# Altium PCB FuelCellMonitor.PcbDoc (part 1 of 2)
Units mil, origin at the board's own origin, x right, y up, seen from the top; angles counter-clockwise.
Board outline 6000 x 4000 mil, 2 copper layers (Top Layer, Bottom Layer); 108 components, 58 nets, 336 pads, 87 vias.
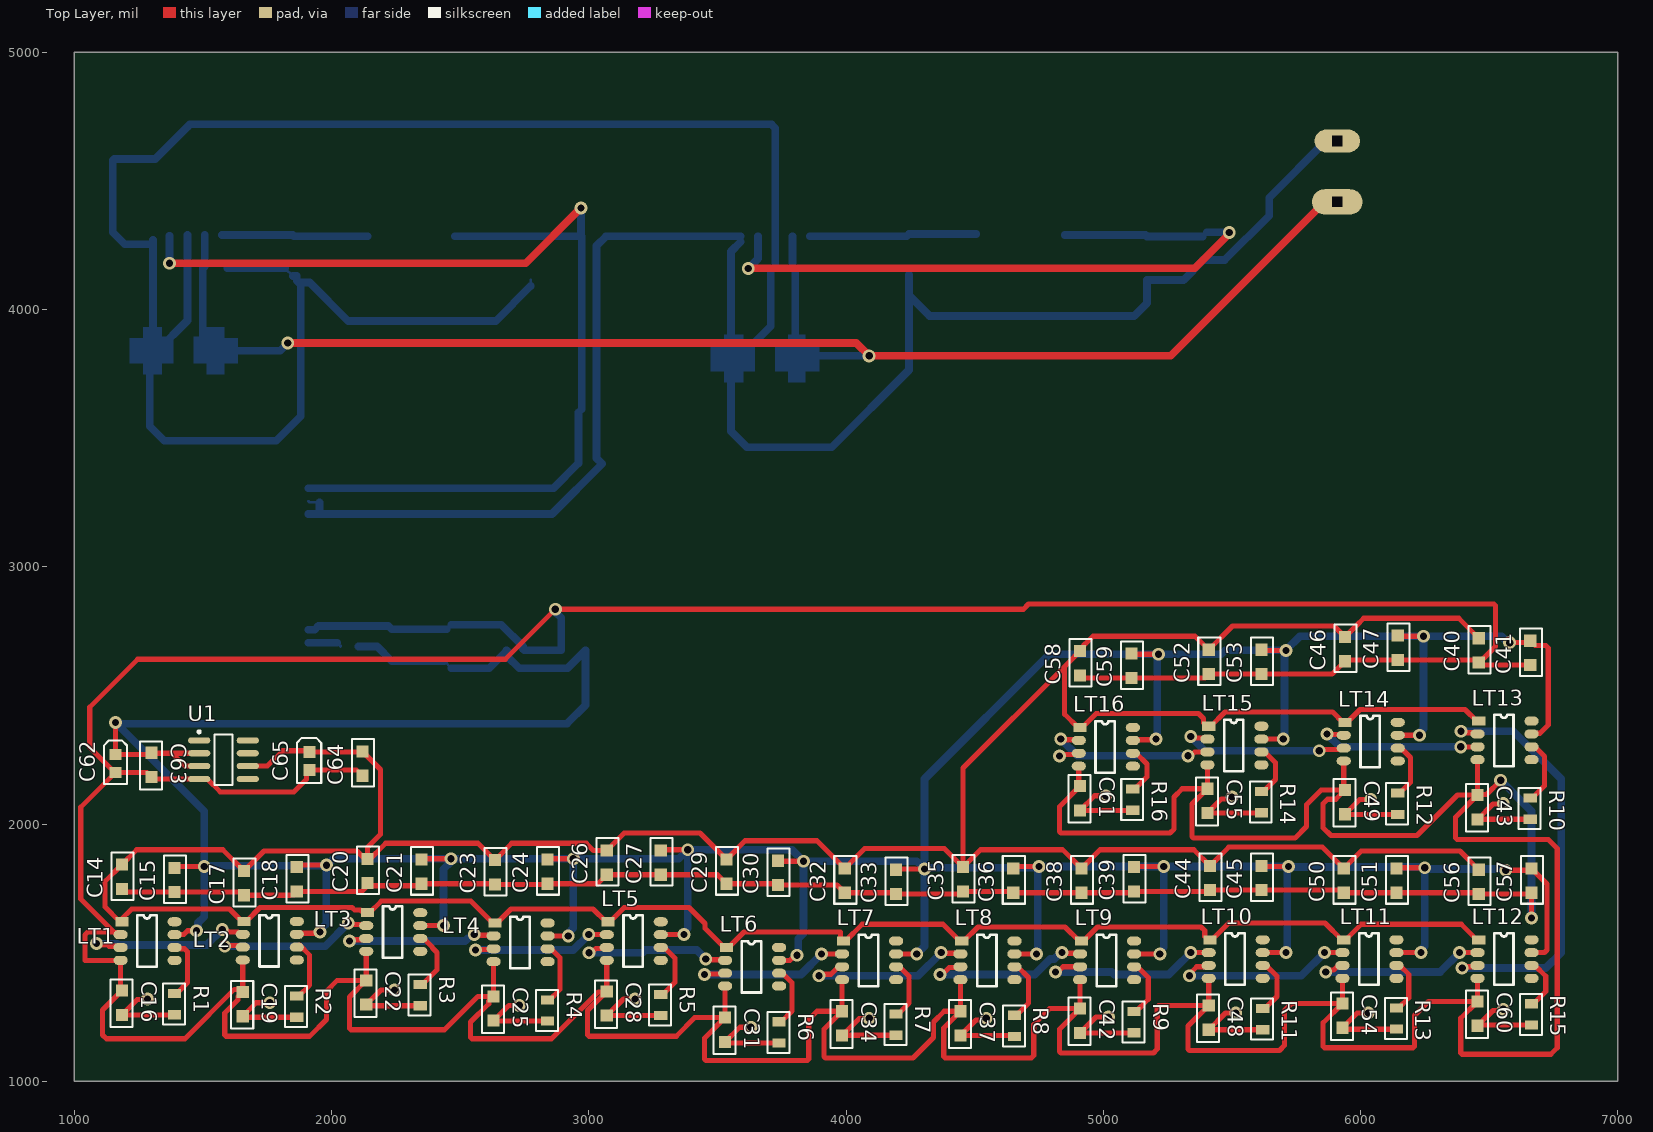
[diagram p0: Top Layer view]
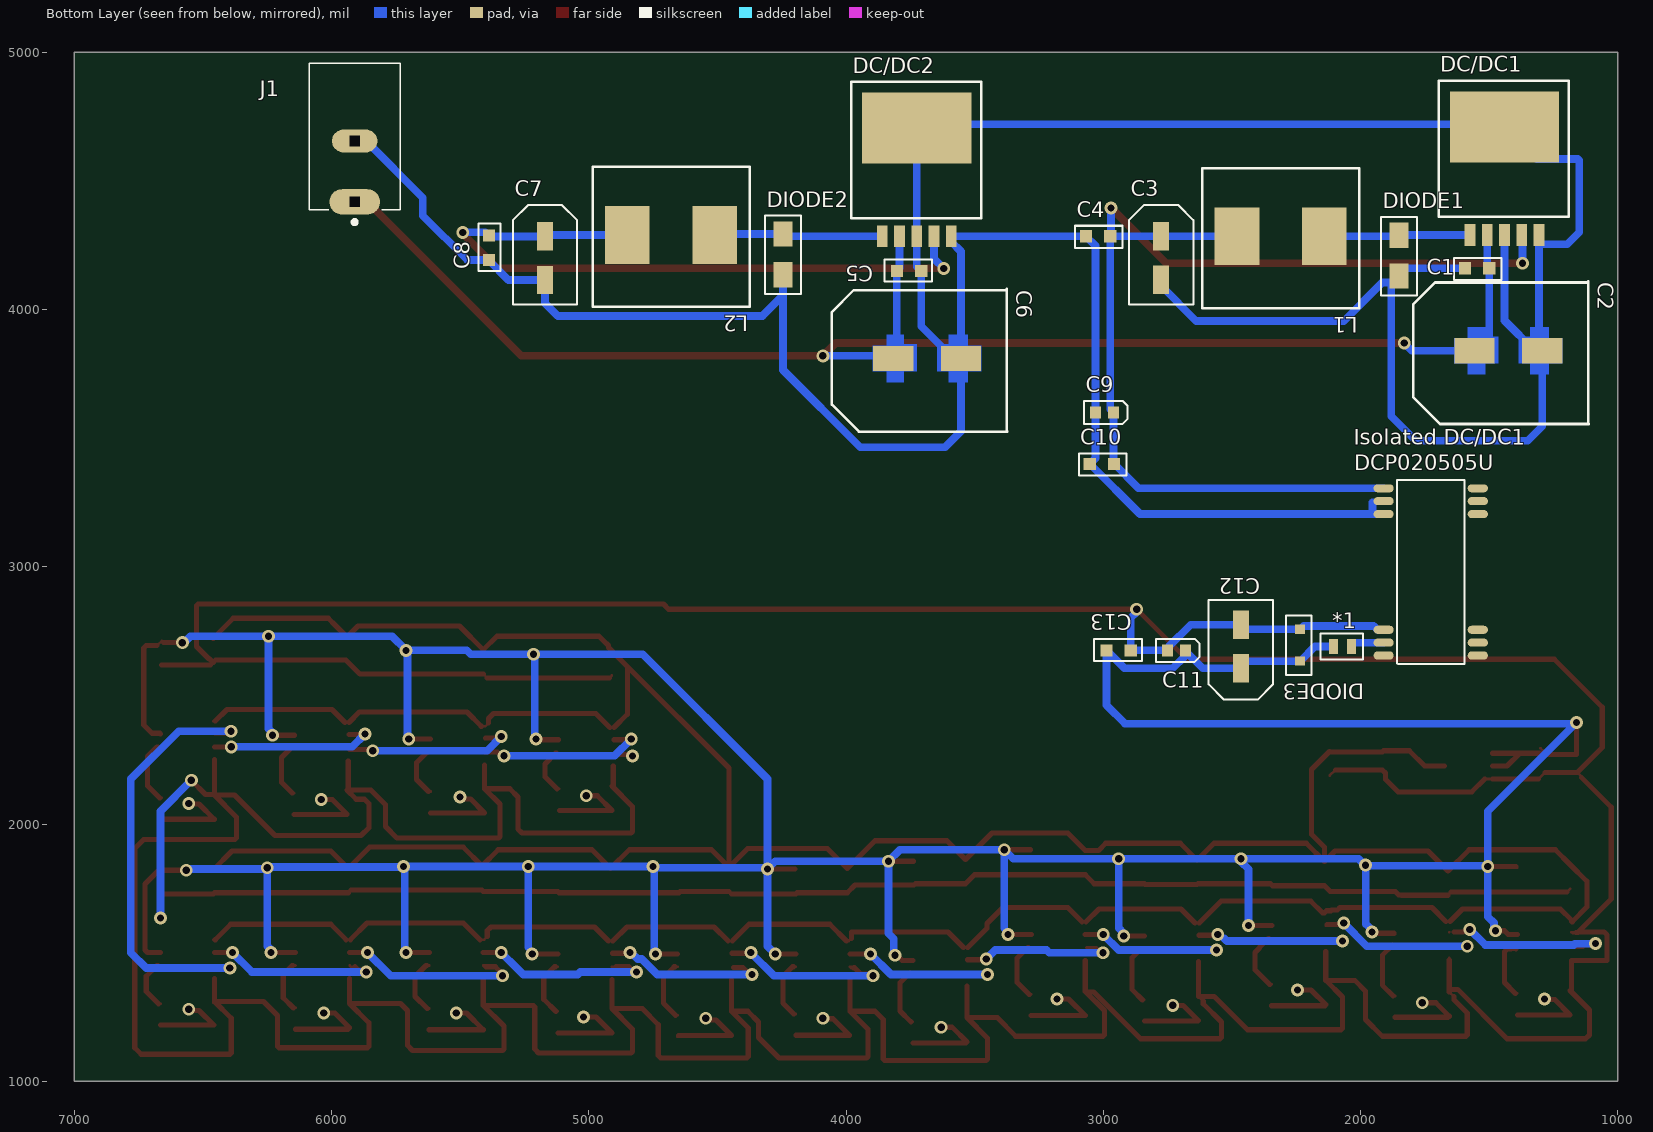
[diagram p1: Bottom Layer view, seen from below]
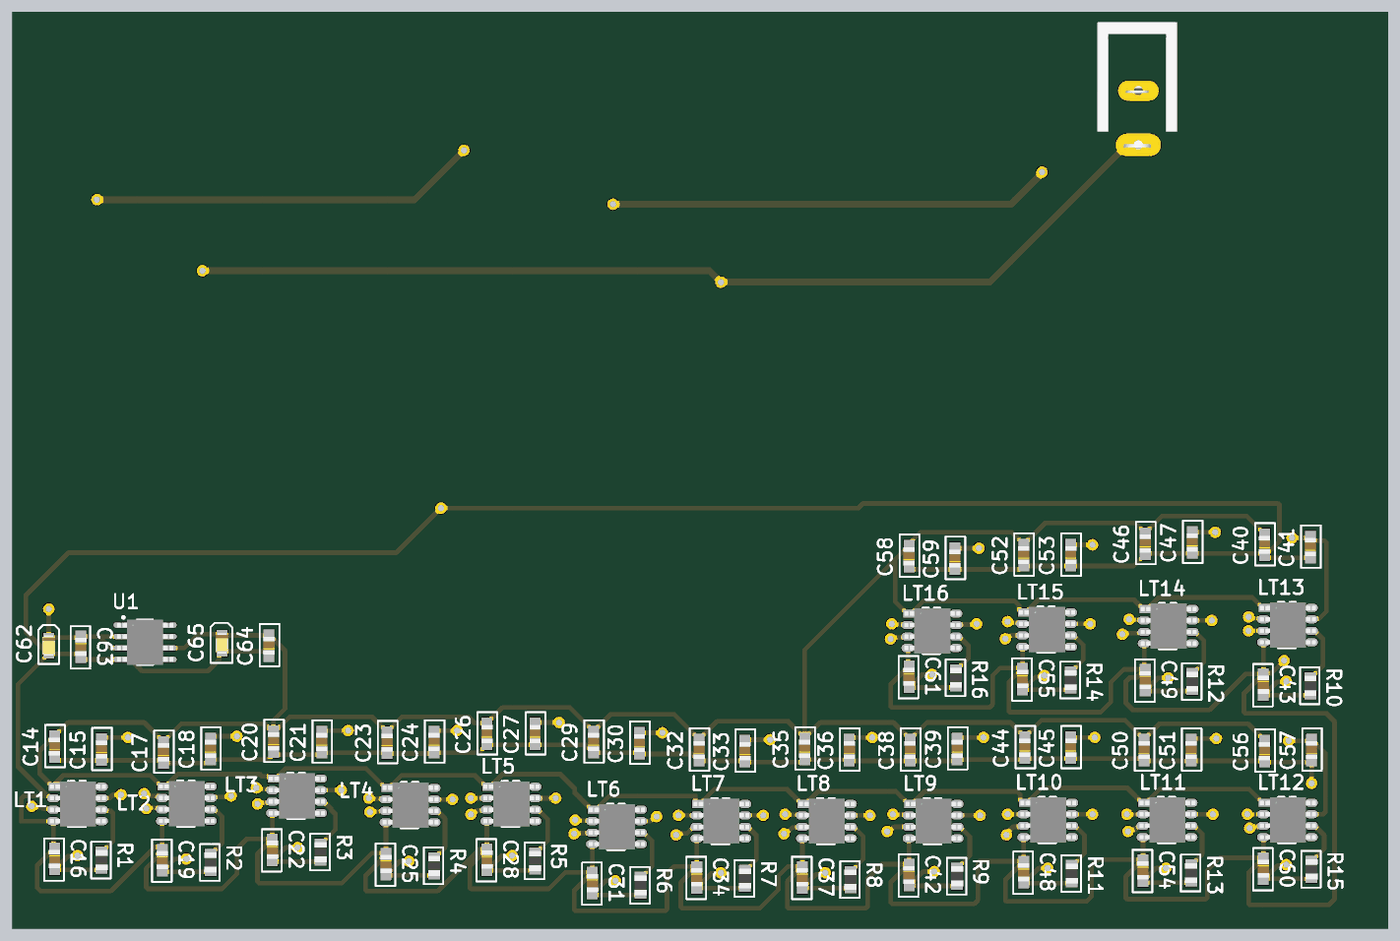
[diagram p2: 3D render of the assembled board from above, using the file's embedded part models]
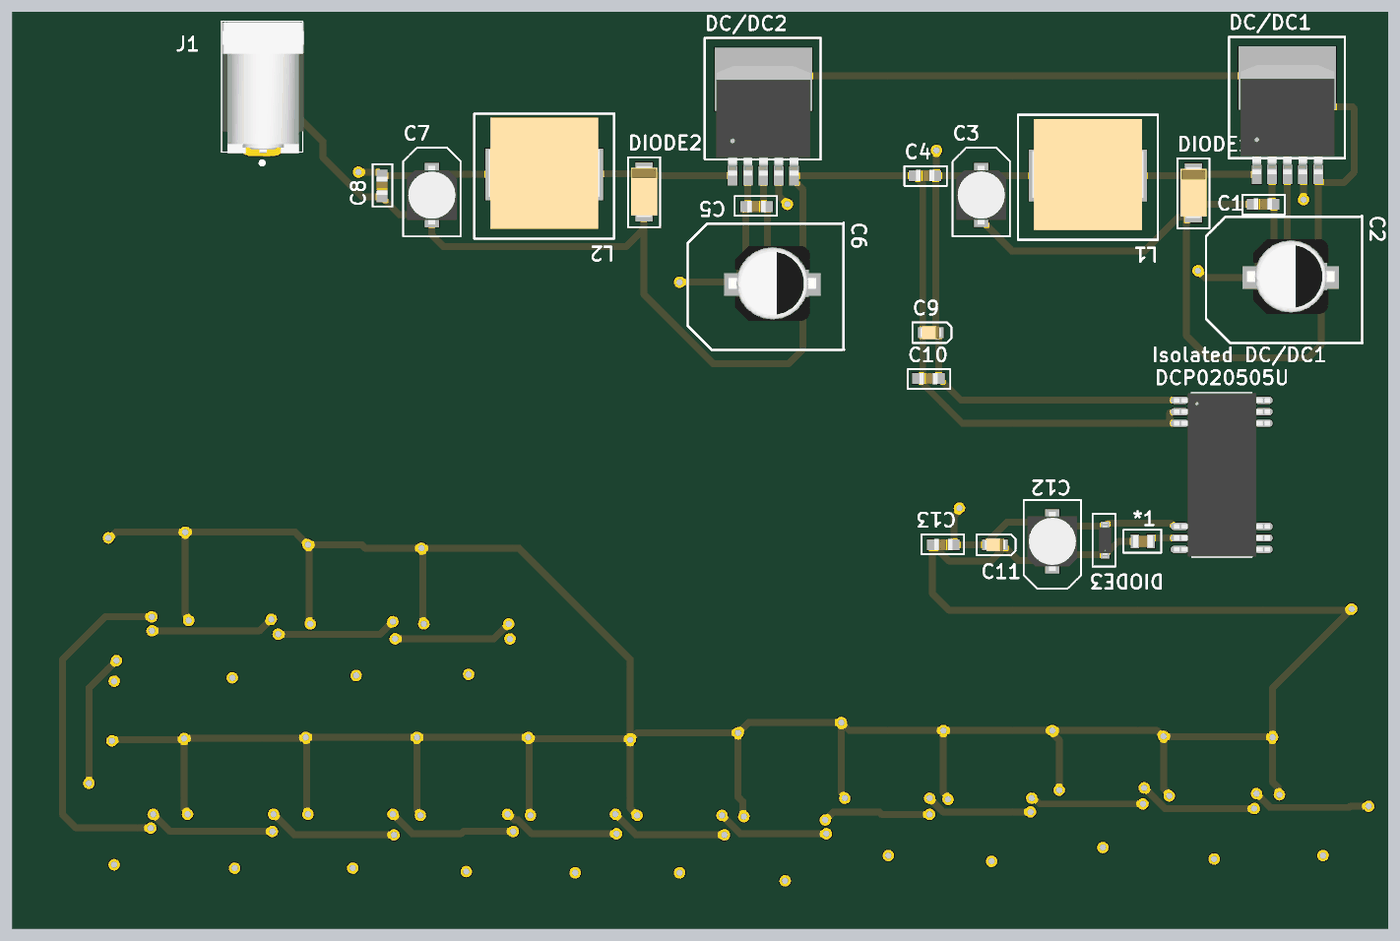
[diagram p3: 3D render of the assembled board from below, using the file's embedded part models]

## Layer stack, top to bottom
Top Solder: solder mask 0.4, Solder Resist, Dk 3.5
Top Layer: signal copper 1.4
Dielectric 1: dielectric 12.6, FR-4, Dk 4.8
Bottom Layer: signal copper 1.4
Bottom Solder: solder mask 0.4, Solder Resist, Dk 3.5

## Board outline
1000,1000 7000,1000 7000,5000 1000,5000

## Design rules (kind name [scope] priority, off if disabled: settings)
Clearance [All] p1: gap=10 ignorepadtopadclearanceinfootprint=FALSE except(0: Arc-Hole Track-Hole SMDPad-Hole THPad-Hole Via-Hole Fill-Hole Poly-Hole Region-Hole Text-Hole)
PolygonConnect [All] p1: connectstyle=Relief reliefconductorwidth=10 reliefentries=4 polygonreliefangle="90 Angle" airgapwidth=10
RoutingVias [All] p1: holewidth=28 width=50 viastyle="Through Hole" minholewidth=28 minwidth=50 maxholewidth=28 maxwidth=50
SolderMaskExpansion [All] p1: expansion=4 istentingtop=FALSE
Width [All] p1: maxlimit=100 minlimit=5 preferedwidth=10
30 further rules are at their usual default settings.

## Classes and differential pairs
component class FuelCellMonitor: J1
component class Designator: C14 C15 C16 C17 C18 C19 C20 C21 C22 C23 C24 C25 C26 C27 C28 C29 C30 C31 C32 C33 C34 C35 C36 C37 C38 C39 C40 C41 C42 C43 C44 C45 C46 C47 C48 C49 C50 C51 C52 C53 C54 C55 C56 C57 C58 C59 C60 C61 LT1 LT2 LT3 LT4 LT5 LT6 LT7 LT8 LT9 LT10 LT11 LT12 LT13 LT14 LT15 LT16 m R1 R2 R3 R4 R5 R6 R7 R8 R9 R10 R11 R12 R13 R14 R15 R16

## Components (designator, comment, footprint, x,y, rotation, side; value= is the part's Value field where it differs from the comment)
*1 "5.1ohm resistor" "5.1 ohm resistor" 2070,2690 r180 bottom
C1 ".1 uF (50 V)" ".1uF capacitor" 1546.89,4160.35 r180 bottom
C2 "330 uF (35 V)" "330uf cap" 1425,3840 r180 bottom
C3 "220 uF (6.3 V)" "220 uf cap" 2775,4200 r90 bottom
C4 ".1 uF (50 V)" ".1uF capacitor" 3020,4285 r180 bottom
C5 ".1 uF (50 V)" ".1uF capacitor" 3755,4150 r0 bottom
C6 "330 uF (35 V)" "330uf cap" 3685,3810 r180 bottom
C7 "220 uF (6.3 V)" "220 uf cap" 5170,4199.65 r90 bottom
C8 ".1 uF (50 V)" ".1uF capacitor" 5387.39,4240 r90 bottom
C9 "10 uF (6.3 V)" "10 uF cap" 2995,3600 r180 bottom
C10 ".1 uF (50 V)" ".1uF capacitor" 3005,3400 r180 bottom
C11 "10 uF (6.3 V)" "10 uF cap" 2715,2675 r180 bottom
C12 "220 uF (6.3 V)" "220 uf cap" 2465,2690 r270 bottom
C13 ".1 uF (50 V)" ".1uF capacitor" 2940,2675 r0 bottom
C14 ".1 uF (50 V)" ".1uF capacitor" 1185,1795 r90 top
C15 ".1 uF (50 V)" ".1uF capacitor" 1390,1782.24 r90 top
C16 ".1 uF (50 V)" ".1uF capacitor" 1185,1305 r270 top
C17 ".1 uF (50 V)" ".1uF capacitor" 1660,1770 r90 top
C18 ".1 uF (50 V)" ".1uF capacitor" 1865,1785 r90 top
C19 ".1 uF (50 V)" ".1uF capacitor" 1655,1300 r270 top
C20 ".1 uF (50 V)" ".1uF capacitor" 2140,1817.24 r90 top
C21 ".1 uF (50 V)" ".1uF capacitor" 2350,1815 r90 top
C22 ".1 uF (50 V)" ".1uF capacitor" 2135,1345 r270 top
C23 ".1 uF (50 V)" ".1uF capacitor" 2635,1812.24 r90 top
C24 ".1 uF (50 V)" ".1uF capacitor" 2840,1815 r90 top
C25 ".1 uF (50 V)" ".1uF capacitor" 2630,1282.76 r270 top
C26 ".1 uF (50 V)" ".1uF capacitor" 3070,1850 r90 top
C27 ".1 uF (50 V)" ".1uF capacitor" 3280,1850 r90 top
C28 ".1 uF (50 V)" ".1uF capacitor" 3070,1302.24 r270 top
C29 ".1 uF (50 V)" ".1uF capacitor" 3535,1815 r90 top
C30 ".1 uF (50 V)" ".1uF capacitor" 3735,1810 r90 top
C31 ".1 uF (50 V)" ".1uF capacitor" 3530,1200 r270 top
C32 ".1 uF (50 V)" ".1uF capacitor" 3995,1780 r90 top
C33 ".1 uF (50 V)" ".1uF capacitor" 4195,1775 r90 top
C34 ".1 uF (50 V)" ".1uF capacitor" 3985,1225 r270 top
C35 ".1 uF (50 V)" ".1uF capacitor" 4455,1785 r90 top
C36 ".1 uF (50 V)" ".1uF capacitor" 4650,1780 r90 top
C37 ".1 uF (50 V)" ".1uF capacitor" 4445,1225 r270 top
C38 ".1 uF (50 V)" ".1uF capacitor" 4915,1780 r90 top
C39 ".1 uF (50 V)" ".1uF capacitor" 5120,1785 r90 top
C40 ".1 uF (50 V)" ".1uF capacitor" 6460,2675 r90 top
C41 ".1 uF (50 V)" ".1uF capacitor" 6660,2665 r90 top
C42 ".1 uF (50 V)" ".1uF capacitor" 4910,1235 r270 top
C43 ".1 uF (50 V)" ".1uF capacitor" 6455,2065 r270 top
C44 ".1 uF (50 V)" ".1uF capacitor" 5415,1790 r90 top
C45 ".1 uF (50 V)" ".1uF capacitor" 5615,1790 r90 top
C46 ".1 uF (50 V)" ".1uF capacitor" 5940,2680 r90 top
C47 ".1 uF (50 V)" ".1uF capacitor" 6145,2685 r90 top
C48 ".1 uF (50 V)" ".1uF capacitor" 5410,1247.24 r270 top
C49 ".1 uF (50 V)" ".1uF capacitor" 5940,2085 r270 top
C50 ".1 uF (50 V)" ".1uF capacitor" 5935,1780 r90 top
C51 ".1 uF (50 V)" ".1uF capacitor" 6140,1780 r90 top
C52 ".1 uF (50 V)" ".1uF capacitor" 5410,2630 r90 top
C53 ".1 uF (50 V)" ".1uF capacitor" 5615,2630 r90 top
C54 ".1 uF (50 V)" ".1uF capacitor" 5930,1255 r270 top
C55 ".1 uF (50 V)" ".1uF capacitor" 5405,2090 r270 top
C56 ".1 uF (50 V)" ".1uF capacitor" 6460,1775 r90 top
C57 ".1 uF (50 V)" ".1uF capacitor" 6665,1780 r90 top
C58 ".1 uF (50 V)" ".1uF capacitor" 4910,2625 r90 top
C59 ".1 uF (50 V)" ".1uF capacitor" 5110,2615 r90 top
C60 ".1 uF (50 V)" ".1uF capacitor" 6455,1262.76 r270 top
C61 ".1 uF (50 V)" ".1uF capacitor" 4910,2100 r270 top
C62 "10 uF (6.3 V)" "10 uF cap" 1160,2235 r90 top
C63 ".1 uF (50 V)" ".1uF capacitor" 1300,2230 r270 top
C64 ".1 uF (50 V)" ".1uF capacitor" 2120,2235 r90 top
C65 "1uf (10V)" "1 uF cap" 1915,2245 r90 top
DC/DC1 "LM2595s-5.0" LM2595s-5.0 1440,4289.92 r90 bottom
DC/DC2 "Value" LM2595s-3.3 3725,4285 r90 bottom
DIODE1 "B340AE-13" B340AE-13 1850,4210 r90 bottom
DIODE2 "B340AE-13" B340AE-13 4245,4215 r90 bottom
DIODE3 "Value" "MMSZ5231B-7-F Zener diode" 2235,2695 r270 bottom
"Isolated DC/DC1" "DCP020505U/1K" "DCP020505U - duplicate" 1910,3305 r180 bottom
J1 "PJ-037A" CUI_PJ-037A 5910,4418.78 r90 bottom
L1 "100 uH" "100uH inductor" 2140,4285 r0 bottom
L2 "100 uH" "100uH inductor" 4510,4290 r0 bottom
LT1 "LT1990" LT1990ACS8 1185,1620 r0 top
LT2 "LT1990" LT1990ACS8 1660,1621.05 r0 top
LT3 "LT1990" LT1990ACS8 2140,1655 r0 top
LT4 "LT1990" LT1990ACS8 2635,1615 r0 top
LT5 "LT1990" LT1990ACS8 3075,1620 r0 top
LT6 "LT1990" LT1990ACS8 3535,1520 r0 top
LT7 "LT1990" LT1990ACS8 3990,1545 r0 top
LT8 "LT1990" LT1990ACS8 4450,1545 r0 top
LT9 "LT1990" LT1990ACS8 4915,1545 r0 top
LT10 "LT1990" LT1990ACS8 5415,1550 r0 top
LT11 "LT1990" LT1990ACS8 5935,1550 r0 top
LT12 "LT1990" LT1990ACS8 6460,1550 r0 top
LT13 "LT1990" LT1990ACS8 6460,2400 r0 top
LT14 "LT1990" LT1990ACS8 5940,2395 r0 top
LT15 "LT1990" LT1990ACS8 5410,2380 r0 top
LT16 "LT1990" LT1990ACS8 4910,2375 r0 top
R1 "1kohm resistor" "1kohm resistor" 1390,1300 r270 top
R2 "1kohm resistor" "1kohm resistor" 1865,1290 r270 top
R3 "1kohm resistor" "1kohm resistor" 2345,1335 r270 top
R4 "1kohm resistor" "1kohm resistor" 2840,1275 r270 top
R5 "1kohm resistor" "1kohm resistor" 3280,1296.34 r270 top
R6 "1kohm resistor" "1kohm resistor" 3740,1190 r270 top
R7 "1kohm resistor" "1kohm resistor" 4195,1220 r270 top
R8 "1kohm resistor" "1kohm resistor" 4655,1215 r270 top
R9 "1kohm resistor" "1kohm resistor" 5120,1230 r270 top
R10 "1kohm resistor" "1kohm resistor" 6660,2060 r270 top
R11 "1kohm resistor" "1kohm resistor" 5620,1241.34 r270 top
R12 "1kohm resistor" "1kohm resistor" 6145,2078.66 r270 top
R13 "1kohm resistor" "1kohm resistor" 6140,1243.66 r270 top
R14 "1kohm resistor" "1kohm resistor" 5615,2085 r270 top
R15 "1kohm resistor" "1kohm resistor" 6665,1260 r270 top
R16 "1kohm resistor" "1kohm resistor" 5115,2095 r270 top
U1 "REF191GSZ-REEL" ADI-R-8_N 1580,2250 r0 top

## Footprints (in the part's own frame and the unit in brackets; to place one, negate y for a bottom-side part, rotate by r counter-clockwise, add the part's x,y. Pads: shape width x height; smd on the part's side, far side on the other; paste and mask are expansions set on the pad)
"1 uF cap" [mm]
  rect 1.15x1.2 smd: 1(0.889,0) 2(-0.889,0)
  silkscreen extent -2.16,-1.14 2.29,1.27, body extent -1.12,-0.72 1.12,0.72, height 1.24
"1kohm resistor" [mm]
  rect 0.9x1.3 smd: 1(-1.05,0) 2(1.05,0)
  silkscreen extent -2.03,-1.14 2.03,1.02, body extent -1.1,-0.67 1.1,0.67, height 0.66
"5.1 ohm resistor" [mm]
  rect 0.9x1.5 smd: 1(-0.889,0) 2(0.889,0)
  silkscreen extent -2.16,-1.27 2.03,1.27, body extent -1.1,-0.67 1.1,0.67, height 0.66
"10 uF cap" [mm]
  rect 1.05x1.2 smd: 1(0.889,0) 2(-0.889,0)
  silkscreen extent -2.03,-1.14 2.29,1.14, body extent -1.12,-0.72 1.12,0.72, height 1.24
"100uH inductor" [mm]
  rect 4.4x5.7 smd: 1(0,0) 2(8.636,0)
  silkscreen extent -3.43,-6.73 12.06,7.11, body extent -1.83,-6.27 10.47,6.02, height 8.05
"220 uf cap" [mm]
  rect 2.8x1.6 smd: 1(2.15,0) 2(-2.15,0)
  silkscreen extent -4.57,-3.18 5.25,3.18, body extent -3.25,-2.76 3.25,2.76, height 6.15
"330uf cap" [mil]
  rect 157x98 smd paste+0 mask+0: 1(-131.89,0) 2(131.89,0)
  Top Layer region: 85,55 40,55 40,-49 85,-49 85,-92 157.39,-92 157.39,-49 210.39,-49 210.39,49 157.39,49 157.39,92 85,92
  Top Layer region: -157.39,49 -210.39,49 -210.39,-49 -157.39,-49 -157.39,-92 -90,-92 -90,-49 -40,-49 -40,55 -90,55 -90,92 -157.39,92
  silkscreen extent -370,-285 312,270, body extent -191,-158 191,168, height 414
".1uF capacitor" [mm]
  rect 1.2x1.2 smd: 1(-1.2,0) 2(1.2,0)
  silkscreen extent -2.29,-1.14 2.41,1.03, body extent -1,-0.63 1,0.63, height 1.35
ADI-R-8_N [mm] "SOIC, 8-Leads, Body 4.9x3.9mm, Pitch 1.27mm, IPC Medium Density"
  oval 2.2x0.6 smd: 1(-2.4,1.905) 2(-2.4,0.635) 3(-2.4,-0.635) 4(-2.4,-1.905) 5(2.4,-1.905) 6(2.4,-0.635) 7(2.4,0.635) 8(2.4,1.905)
  silkscreen extent -2.52,-2.5 0.9,2.88, body extent -3.1,-2.5 3.1,2.5, height 1.76
B340AE-13 [mm]
  rect 2.5x1.9 smd: A(-2.032,0) K(2,0)
  silkscreen extent -3.94,-1.78 3.81,1.78, body extent -2.79,-1.46 2.79,1.46, height 2.44
CUI_PJ-037A [mm]
  oval 2.5x5 hole 1 square: 1(0,0)
  oval 2.25x4.5 hole 1 square: 2(6,0)
  silkscreen extent -2.2,-4.5 13.7,4.5, body extent -0.91,-4.63 13.59,4.37, height 10.51
"DCP020505U - duplicate" [mm]
  oval 2x0.8 smd: 1(0,0) 2(0,-1.27) 3(0,-2.54) 4(0,-13.97) 5(0,-15.24) 6(0,-16.51) 7(9.3,0) 8(9.3,-1.27) 9(9.3,-2.54) 10(9.3,-13.97) 11(9.3,-15.24) 12(9.3,-16.51)
  silkscreen extent 1.33,-17.35 7.97,0.82, body extent -0.63,-17.3 10.02,0.79, height 1.7
LM2595s-3.3 [mm]
  rect 2.16x1.07 smd: 1(0,3.4) 2(0,1.7) 3(0,0) 4(0,-1.7) 5(0,-3.4)
  rect 7x10.8 smd: 6(10.67,0)
  silkscreen extent 1.78,-6.35 15.24,6.48, body extent 0,-5.21 12.13,5.21, height 4.8
LM2595s-5.0 [mm]
  rect 2.16x1.07 smd: 1(0,3.4) 2(0,1.7) 3(0,0) 4(0,-1.7) 5(0,-3.4)
  rect 7x10.8 smd: 6(10.67,0)
  silkscreen extent 1.78,-6.35 15.24,6.48, body extent 0,-5.21 12.13,5.21, height 4.8
LT1990ACS8 [mil]
  rect 51.18x35 smd: 1(0,0)
  oval 55.12x35 smd: 2(-5,-50) 3(-5,-100) 4(-5,-150) 5(205,-150) 6(205,-100) 7(205,-50) 8(205,0)
  silkscreen extent 60,-175 135,25, body extent -20,-174 224,24, height 69
"MMSZ5231B-7-F Zener diode" [mm]
  rect 0.9x0.95 smd: A(-1.575,0) K(1.575,0)
  silkscreen extent -2.92,-1.4 2.92,1.13, body extent -1.92,-0.67 1.92,0.67, height 0.81

## Part data
C1 C4 C5 C8 C10 C13 C14 C15 C16 C17 C18 C19 C20 C21 C22 C23 C24 C25 C26 C27 C28 C29 C30 C31 C32 C33 C34 C35 C36 C37 C38 C39 C40 C41 C42 C43 C44 C45 C46 C47 C48 C49 C50 C51 C52 C53 C54 C55 C56 C57 C58 C59 C60 C61 C63 C64: library part ".1 uF cap"
C2 C6: library part "330 uF cap"
C3 C7 C12: library part "220 uF capacitor"
C9 C11 C62: library part "10 uF cap"
C65: library part "1uf cap"
DC/DC1: library part LM2595S-5.0/NOPB, "SIMPLE SWITCHE Power Converter 150 KHz 1A Step-Down Voltage egulator 5-DDPAK/TO-263", Case/Package=TO-263, Frequency=150kHz, Manufacturer="Texas Instruments", Max Input Voltage=40V, Max Operating Temperature=125°C, Max Output Current=1A, Max Output Voltage=5V, Min Input Voltage=4.5V, Min Operating Temperature=-40°C, Package Quantity=45, Quiescent Current=5mA, Supplier Part Number 1=LM2595S-5.0/NOPB-ND, Switching Frequency=173kHz, Category="Voltage Regulators - Switching", ComponentLink1Description=https://datasheet.ciiva.com/14150/eanatsemico-schaltr-lm2595-en-14150687.pdf?src-supplier=Distrelec, ComponentLink1URL=https://datasheet.ciiva.com/14150/eanatsemico-schaltr-lm2595-en-14150687.pdf?src-supplier=Distrelec, ComponentLink2Description=https://datasheet.ciiva.com/15112/getdatasheetpartid-89913-15112836.pdf?src-supplier=Verical, ComponentLink2URL=https://datasheet.ciiva.com/15112/getdatasheetpartid-89913-15112836.pdf?src-supplier=Verical, ComponentLink3Description=https://datasheet.ciiva.com/25775/1771567-25775403.pdf?src-supplier=Farnell, ComponentLink3URL=https://datasheet.ciiva.com/25775/1771567-25775403.pdf?src-supplier=Farnell, ComponentLink4Description=https://datasheet.ciiva.com/22746/1771567-22746709.pdf?src-supplier=Element14, ComponentLink4URL=https://datasheet.ciiva.com/22746/1771567-22746709.pdf?src-supplier=Element14, ComponentLink5Description=https://datasheet.ciiva.com/3219/lm2595-3219977.pdf?src-supplier=Avnet, ComponentLink5URL=https://datasheet.ciiva.com/3219/lm2595-3219977.pdf?src-supplier=Avnet, Efficiency=82%, Height=4.57mm, Lead Free="Contains Lead", Length=10.16mm, Manufacturer Part Number=LM2595S-5.0/NOPB, Max Supply Voltage=40V, Min Supply Voltage=4.5V, Mount="Surface Mount", Nominal Output Voltage=5V, Number of Outputs=1, Number of Pins=5, Output Current=1A, Output Type=Fixed, Output Voltage=5V, Packaging=Rail/Tube, Radiation Hardening=No, REACH SVHC="No SVHC", RoHS=Yes, RoHS Compliant=Yes, Supplier 1=Digi-Key, Termination=SMD/SMT, Weight=0.25lb, Width=8.64mm
DC/DC2: library part LM2595SX-3.3/NOPB_1, "SIMPLE SWITCHE Power Converter 150 KHz 1A Step-Down Voltage egulator 5-DDPAK/TO-263", Case/Package=TO-263, Frequency=150kHz, Manufacturer="Texas Instruments", Manufacturer Part Number=LM2595S-5.0/NOPB, Max Input Voltage=40V, Max Operating Temperature=125°C, Max Output Current=1A, Max Output Voltage=5V, Min Input Voltage=4.5V, Min Operating Temperature=-40°C, Package Quantity=45, Quiescent Current=5mA, Switching Frequency=173kHz, Category="Voltage Regulators - Switching", ComponentLink1Description=https://datasheet.ciiva.com/14150/eanatsemico-schaltr-lm2595-en-14150687.pdf?src-supplier=Distrelec, ComponentLink1URL=https://datasheet.ciiva.com/14150/eanatsemico-schaltr-lm2595-en-14150687.pdf?src-supplier=Distrelec, ComponentLink2Description=https://datasheet.ciiva.com/15112/getdatasheetpartid-89913-15112836.pdf?src-supplier=Verical, ComponentLink2URL=https://datasheet.ciiva.com/15112/getdatasheetpartid-89913-15112836.pdf?src-supplier=Verical, ComponentLink3Description=https://datasheet.ciiva.com/25775/1771567-25775403.pdf?src-supplier=Farnell, ComponentLink3URL=https://datasheet.ciiva.com/25775/1771567-25775403.pdf?src-supplier=Farnell, ComponentLink4Description=https://datasheet.ciiva.com/22746/1771567-22746709.pdf?src-supplier=Element14, ComponentLink4URL=https://datasheet.ciiva.com/22746/1771567-22746709.pdf?src-supplier=Element14, ComponentLink5Description=https://datasheet.ciiva.com/3219/lm2595-3219977.pdf?src-supplier=Avnet, ComponentLink5URL=https://datasheet.ciiva.com/3219/lm2595-3219977.pdf?src-supplier=Avnet, Efficiency=82%, Height=4.57mm, Lead Free="Contains Lead", Length=10.16mm, Max Supply Voltage=40V, Min Supply Voltage=4.5V, Mount="Surface Mount", Nominal Output Voltage=5V, Number of Outputs=1, Number of Pins=5, Output Current=1A, Output Type=Fixed, Output Voltage=5V, Packaging=Rail/Tube, Radiation Hardening=No, REACH SVHC="No SVHC", RoHS=Yes, RoHS Compliant=Yes, Supplier 1=Digi-Key, Termination=SMD/SMT, Weight=0.25lb, Width=8.64mm
DIODE1 DIODE2: "Schottky Diode, DO-201, 40V, 3.00A", Average Rectified Current=3A, Capacitance=190pF, Case/Package=DO-201AD, Forward Voltage=950mV, Manufacturer=STMicroelectronics, Max Forward Surge Current (Ifsm)=80A, Max Operating Temperature=150°C, Max Repetitive Reverse Voltage (Vrrm)=40V, Max Reverse Current=2mA, Min Operating Temperature=-65°C, Package Quantity=1, Supplier Part Number 1=511-1N5822, Category="Rectifier Diodes", ComponentLink1Description=https://datasheet.ciiva.com/1177/1689683-1177129.pdf?src-supplier=Element14, ComponentLink1URL=https://datasheet.ciiva.com/1177/1689683-1177129.pdf?src-supplier=Element14, ComponentLink2Description=https://datasheet.ciiva.com/26339/168275-da-01-en-schottky-barrier-rectif-axial-1n5822-26339005.pdf?src-supplier=Conrad, ComponentLink2URL=https://datasheet.ciiva.com/26339/168275-da-01-en-schottky-barrier-rectif-axial-1n5822-26339005.pdf?src-supplier=Conrad, ComponentLink3Description=https://datasheet.ciiva.com/16303/cd00001626-16303311.pdf?src-supplier=Future+Electronics, ComponentLink3URL=https://datasheet.ciiva.com/16303/cd00001626-16303311.pdf?src-supplier=Future+Electronics, ComponentLink4Description=https://datasheet.ciiva.com/916/cd00001626-916051.pdf?src-supplier=Digi-Key, ComponentLink4URL=https://datasheet.ciiva.com/916/cd00001626-916051.pdf?src-supplier=Digi-Key, ComponentLink5Description=https://datasheet.ciiva.com/916/cd00001626-916050.pdf?src-supplier=Digi-Key, ComponentLink5URL=https://datasheet.ciiva.com/916/cd00001626-916050.pdf?src-supplier=Digi-Key, Current Rating=3A, Element Configuration=Single, Forward Current=3A, Height=5.3mm, Lead Free="Lead Free", Length=9.5mm, Manufacturer Part Number=B340AE-13, Max Reverse Leakage Current=2mA, Max Reverse Voltage (DC)=40V, Max Surge Current=80A, Mount="Through Hole", Number of Pins=2, Output Current=3A, Packaging="Tape and Reel", Peak Non-Repetitive Surge Current=80A, Polarity=Standard, Pricing 1="1=0.47000, 10=0.38600, 50=0.38600, 100=0.26300, 600=0.19700, 1000=0.19700, 1200=0.14700, 2400=0.12700, 9600=0.11900, 10000=0.11900 (USD)", Radiation Hardening=No, REACH SVHC="No SVHC", RoHS=Yes, RoHS Compliant=Yes, Series=-, Stock 1=125419, Supplier 1=Mouser, Voltage Rating (DC)=40V, Weight=0.01lb, Width=5.3mm
DIODE3: library part MMSZ5231B-7-F, "Zener diode", Average Rectified Current=3A, Capacitance=190pF, Case/Package=DO-201AD, Forward Voltage=950mV, Manufacturer=STMicroelectronics, Max Forward Surge Current (Ifsm)=80A, Max Operating Temperature=150°C, Max Repetitive Reverse Voltage (Vrrm)=40V, Max Reverse Current=2mA, Min Operating Temperature=-65°C, Package Quantity=1, Supplier Part Number 1=511-1N5822, Category="Rectifier Diodes", ComponentLink1Description=https://datasheet.ciiva.com/1177/1689683-1177129.pdf?src-supplier=Element14, ComponentLink1URL=https://datasheet.ciiva.com/1177/1689683-1177129.pdf?src-supplier=Element14, ComponentLink2Description=https://datasheet.ciiva.com/26339/168275-da-01-en-schottky-barrier-rectif-axial-1n5822-26339005.pdf?src-supplier=Conrad, ComponentLink2URL=https://datasheet.ciiva.com/26339/168275-da-01-en-schottky-barrier-rectif-axial-1n5822-26339005.pdf?src-supplier=Conrad, ComponentLink3Description=https://datasheet.ciiva.com/16303/cd00001626-16303311.pdf?src-supplier=Future+Electronics, ComponentLink3URL=https://datasheet.ciiva.com/16303/cd00001626-16303311.pdf?src-supplier=Future+Electronics, ComponentLink4Description=https://datasheet.ciiva.com/916/cd00001626-916051.pdf?src-supplier=Digi-Key, ComponentLink4URL=https://datasheet.ciiva.com/916/cd00001626-916051.pdf?src-supplier=Digi-Key, ComponentLink5Description=https://datasheet.ciiva.com/916/cd00001626-916050.pdf?src-supplier=Digi-Key, ComponentLink5URL=https://datasheet.ciiva.com/916/cd00001626-916050.pdf?src-supplier=Digi-Key, Current Rating=3A, Element Configuration=Single, Forward Current=3A, Height=5.3mm, Lead Free="Lead Free", Length=9.5mm, Manufacturer Part Number=MMSZ5231B-7-F, Max Reverse Leakage Current=2mA, Max Reverse Voltage (DC)=40V, Max Surge Current=80A, Mount="Through Hole", Number of Pins=2, Output Current=3A, Packaging="Tape and Reel", Peak Non-Repetitive Surge Current=80A, Polarity=Standard, Pricing 1="1=0.47000, 10=0.38600, 50=0.38600, 100=0.26300, 600=0.19700, 1000=0.19700, 1200=0.14700, 2400=0.12700, 9600=0.11900, 10000=0.11900 (USD)", Radiation Hardening=No, REACH SVHC="No SVHC", RoHS=Yes, RoHS Compliant=Yes, Series=-, Stock 1=125419, Supplier 1=Mouser, Voltage Rating (DC)=40V, Weight=0.01lb, Width=5.3mm
"Isolated DC/DC1": "Miniature, 2W Isolated Unregulated DC/DC Converters 12-SOP -40 to 85", Case/Package=SOP, Current - Output 1=400mA, Isolation Voltage=1kV, Manufacturer="Texas Instruments", Max Input Voltage=5.5V, Max Operating Temperature=85°C, Max Output Power=2W, Max Output Voltage=5.25V, Max Power Dissipation=90mW, Min Input Voltage=4.5V, Min Operating Temperature=-40°C, Min Output Voltage=4.75V, Output Voltage=5V, Package Quantity=1000, Quiescent Current=18mA, Supplier Part Number 1=296-41242-1-ND, Switching Frequency=400kHz, Category="Integrated Circuits (ICs)", ComponentLink1Description=https://datasheet.ciiva.com/2035/dcp020503-2035713.pdf?src-supplier=Digi-Key, ComponentLink1URL=https://datasheet.ciiva.com/2035/dcp020503-2035713.pdf?src-supplier=Digi-Key, Efficiency=80%, Features=OTP, Height=0.1inch, Lead Free="Lead Free", Length=0.71inch, Manufacturer Part Number=DCP020505U/1K, Max Output Current=400mA, Number of Outputs=1, Number of Pins=12, Output Current=400mA, Output Power=2W, Output Type=Fixed, Packaging="Tape and Reel", Radiation Hardening=No, RoHS=Yes, RoHS Compliant=Yes, Series=DCP02, Supplier 1=Digi-Key, Voltage - Output 1=5V, Width=0.3inch
J1: "2.0 mm Center Pin, 2.5 A, Right Angle, Through Hole, Dc Power Jack Connector", Package=None, Availability=Unavailable, MP=PJ-037A, Price=None
L1 L2: library part "100 uH inductor"
U1: "Precision Micropower, Low Dropout Voltage Reference, 2.048 V Output, 2.3 to 15 V Supply, Industrial, 8-pin SOIC (R-8), Reel", Manufacturer="Analog Devices", Operating Temp Range="-40 to 85 degC", Code_JEDEC=MS-012-AA, ComponentLink1Description="Manufacturer URL", ComponentLink1URL=http://www.analog.com/en/index.html, ComponentLink2Description=Datasheet, ComponentLink2URL=http://www.analog.com/static/imported-files/data_sheets/REF19xSeries.pdf, ComponentLink3Description="Package Specification", ComponentLink3URL=http://www.analog.com/static/imported-files/packages/PKG_PDF/SOIC_Narrow%20(R)/R_8.pdf, ComponentLink4Description="URL Link1", ComponentLink4URL="Product URL:http://www.analog.com/en/special-linear-functions/voltage-references/ref191/products/product.html", DatasheetVersion="Rev. L", Mounting Technology="Surface Mount", PackageDescription="8-Pin Standard Small Outline Package, Body 4.9 x 3.9 mm, Pitch 1.27 mm", PackageReference=R-8, PackageVersion="060506-A, 06/2006", Packing=Reel, PartNumber=REF191GSZ-REEL, Ref Out TC (ppm/C)=10, Vout=2.048V

## Via types
v1: diameter 50, hole 28, Top Layer to Bottom Layer, 87 vias

## Nets (pads, with @x,y where several pads share a name; then routed paths per layer and width w, separated by ;. In a path a pad name is that pad's centre, name@x,y a point inside that pad or via, vN(x,y) a via of type N, cw(c..) or ccw(c..) an arc to the next point about the centre after c; other vN are vias at no path point)
2.048_VDC: C14.2 C17.2 C20.2 C23.2 C26.2 C29.2 C32.2 C35.2 C38.2 C40.2 C44.2 C46.2 C50.2 C52.2 C56.2 C58.2 C64.2 C65.1 LT1.1 LT2.1 LT3.1 LT4.1 LT5.1 LT6.1 LT7.1 LT8.1 LT9.1 LT10.1 LT11.1 LT12.1 LT13.1 LT14.1 LT15.1 LT16.1 U1.6 | length 17710.8
  Top Layer w10: LT1.1@1176.91,1620 LT1.1 ; LT2.1@1651.91,1621.05 LT2.1 LT2.1@1668.09,1621.05 ; C65.1@1910,2285 C65.1 ; C64.2@2117.76,2280 C64.2 ; LT3.1 LT3.1@2148.09,1655 ; LT4.1@2626.91,1615 LT4.1 LT4.1@2643.09,1615 ; LT5.1@3066.91,1620 LT5.1 LT5.1@3083.09,1620 ; LT6.1@3526.91,1520 LT6.1 LT6.1@3543.09,1520 ; LT7.1@3979.14,1555.86 LT7.1 LT7.1@3998.09,1545 ; LT8.1@4441.91,1545 LT8.1 LT8.1@4458.09,1545 ; LT16.1@4901.91,2375 LT16.1 LT16.1@4918.09,2375 ; LT9.1@4906.91,1545 LT9.1 LT9.1@4923.09,1545 ; LT15.1@5389.41,2392.5 5401.91,2380 LT15.1 LT15.1@5418.09,2380 ; LT10.1@5394.41,1562.5 5406.91,1550 LT10.1 LT10.1@5423.09,1550 ; LT11.1@5926.91,1550 LT11.1 LT11.1@5943.09,1550 ; LT14.1@5931.91,2395 LT14.1 LT14.1@5948.09,2395 ; 5984.74,2771.98 5984.74,2773.88 ; LT12.1@6451.91,1550 LT12.1 ; LT13.1@6451.91,2400 LT13.1
  Top Layer w20: LT1.1@1176.91,1620 1120,1676.91 1120,1777.24 C14.2 1242.76,1900 1577.24,1900 C17.2 1737.76,1895 2099.49,1895 C20.2@2140,1854.49 ; LT1.1@1179.05,1625.95 1223.09,1670 1602.96,1670 LT2.1@1651.91,1621.05 ; LT2.1@1668.09,1621.05 1722.04,1675 2080,1675 2090,1665 2112.69,1665 2115.19,1662.5 2132.5,1662.5 LT3.1 ; U1.6 1750,2225 1810,2285 C65.1@1910,2285 ; C65.1 C64.2@2117.76,2280 ; C64.2 2190,2212.24 2190,1960 2140,1910 2140,1874.49 C20.2@2140,1854.49 ; LT3.1@2148.09,1655 2193.09,1700 2541.91,1700 LT4.1@2626.91,1615 ; LT4.1@2643.09,1615 2698.09,1670 3016.91,1670 LT5.1@3066.91,1620 ; LT5.1@3083.09,1620 3138.09,1675 3390,1675 3452.2,1612.8 3452.2,1594.7 LT6.1@3526.91,1520 ; LT6.1@3543.09,1520 3603.09,1580 3979.14,1580 LT7.1@3979.14,1555.86 ; LT7.1@3998.09,1545 4063.09,1610 4376.91,1610 LT8.1@4441.91,1545 ; LT8.1@4458.09,1545 4513.09,1600 4851.91,1600 LT9.1@4906.91,1545 ; LT16.1@4901.91,2375 4850,2426.91 4850,2612.24 ; LT16.1@4918.09,2375 4973.09,2430 5370,2430 5389.41,2410.59 LT15.1@5389.41,2392.5 ; LT9.1@4923.09,1545 4978.09,1600 5380,1600 5394.41,1585.59 LT10.1@5394.41,1562.5 ; LT15.1@5418.09,2380 5473.09,2435 5891.91,2435 LT14.1@5931.91,2395 ; LT10.1@5423.09,1550 5488.09,1615 5861.91,1615 LT11.1@5926.91,1550 ; LT11.1@5943.09,1550 6003.09,1610 6391.91,1610 LT12.1@6451.91,1550 ; LT14.1@5948.09,2395 5998.09,2445 6406.91,2445 LT13.1@6451.91,2400 ; C56.2 6387.24,1895 6002.76,1895 C50.2 5852.24,1910 5487.76,1910 C44.2 5352.24,1900 4987.76,1900 C38.2 4842.24,1900 4522.76,1900 C35.2 ; C40.2 6382.24,2800 6012.76,2800 5984.74,2771.98 C46.2 5897.24,2770 5502.76,2770 C52.2 5357.24,2730 4960,2730 4944.31,2714.31 4923.62,2693.62 4923.62,2685.87 4850,2612.24 ; C20.2@2140,1854.49 2210.51,1925 2569.49,1925 C23.2 2700.51,1925 2990,1925 3017.76,1897.24 C26.2 3137.76,1965 3432.24,1965 C29.2 3607.76,1935 3887.24,1935 C32.2 4072.76,1905 4382.24,1905 C35.2 ; C35.2 4455,2217.24 4850,2612.24
5VDC: "Isolated DC/DC1.1" C3.1 C4.2 C9.1 C10.2 DC/DC1.4 L1.2 | length 4382.8
  Top Layer w30: v1(1370,4180) 2755,4180 v1(2970,4395)
  Bottom Layer w10: DC/DC1.4@1370,4286.85 DC/DC1.4 ; C3.1@2774.65,4285 C3.1 ; C10.2 C10.2@2960,3402.24 ; C9.1 C9.1@2972.76,3612.76 ; C4.2@2970,4287.76 C4.2 C4.2@2972.4,4284.65
  Bottom Layer w30: v1(1370,4180) DC/DC1.4@1370,4286.85 ; 1910,3305 2862.76,3305 C10.2 ; L1.2 C3.1@2774.65,4285 ; C3.1 C4.2@2972.4,4284.65 ; C10.2@2960,3402.24 C9.1 ; C4.2@2970,4287.76 v1(2970,4395) ; C9.1@2972.76,3612.76 C4.2
12VDC: C1.2 C2.1 C5.2 C6.1 DC/DC1.2 DC/DC2.2 J1.1 | length 5881.3
  Top Layer w10: J1.1@5860.79,4418.78 J1.1
  Top Layer w30: v1(1830,3870) 4040,3870 v1(4090,3820) 5262.01,3820 J1.1@5860.79,4418.78
  Bottom Layer w10: C2.1@1499.65,3884 1543.65,3840 C2.1 ; C1.2 C1.2@1506.93,4167.64 ; C5.2@3791.93,4160.31 C5.2 ; C6.1@3802.24,3824.65 C6.1 C6.1@3826.89,3820
  Bottom Layer w30: C2.1@1499.65,3884 C1.2 ; C1.2@1506.93,4167.64 DC/DC1.2 ; C2.1 1800,3840 v1(1830,3870) ; C5.2@3791.93,4160.31 DC/DC2.2 ; C6.1@3802.24,3824.65 C5.2 ; C6.1@3826.89,3820 v1(4090,3820)
"+5 ISO": *1.1 C11.1 C12.1 C13.2 C15.2 C18.2 C21.2 C24.2 C27.2 C30.2 C33.2 C36.2 C39.2 C41.2 C45.2 C47.2 C51.2 C53.2 C57.2 C59.2 C62.1 C63.1 DIODE3.K LT1.7 LT2.7 LT3.7 LT4.7 LT5.7 LT6.7 LT7.7 LT8.7 LT9.7 LT10.7 LT11.7 LT12.7 LT13.7 LT14.7 LT15.7 LT16.7 U1.2 U1.3 | length 20791
  Top Layer w10: C63.1@1291.38,2285.87 C63.1@1300,2294.49 ; C63.1@1297.24,2270 C63.1@1302.24,2275 ; LT1.7 LT1.7@1390.51,1570.51 ; C15.2 C15.2@1395.51,1835 ; LT2.7 LT2.7@1869.47,1575.53 ; C18.2 C18.2@1872.76,1840 ; v1@1950.53,1575.53 v1(1955,1580) ; C21.2 C21.2@2352.76,1865 ; C24.2 C24.2@2842.76,1865 ; C27.2 C27.2@3282.76,1900 ; C30.2 C30.2@3737.24,1855 ; v1@3802.56,1490 v1(3810,1490) ; C33.2 C33.2@4197.76,1825 ; C36.2 C36.2@4657.76,1835 ; C59.2 C59.2@5112.24,2660 ; LT16.7@5117.5,2327.5 LT16.7 LT16.7@5125.06,2325 ; C39.2 C39.2@5122.76,1835 ; v1@5202.5,2327.5 v1(5205,2330) ; C45.2 C45.2@5617.24,1835 ; LT15.7 LT15.7@5618.42,2333.42 ; C53.2 C53.2@5617.24,2675 ; C51.2 C51.2@6142.76,1830 ; C47.2 C47.2@6147.24,2730 ; C41.2@6652.76,2705 C41.2 C41.2@6678.62,2693.62 ; C57.2@6657.76,1820 C57.2
  Top Layer w20: v1(1160,2395) C62.1 C63.1@1297.24,2270 ; C63.1@1302.24,2275 1380,2275 ; LT1.7@1390.51,1570.51 1425.51,1570.51 1440,1585 v1(1475,1585) ; C15.2@1395.51,1835 v1(1505,1835) ; U1.3 1430,2225 1380,2275 ; U1.2 1380,2275 ; LT2.7@1869.47,1575.53 v1@1950.53,1575.53 ; C18.2@1872.76,1840 v1(1980,1840) ; LT3.7 v1(2435,1605) ; C21.2@2352.76,1865 v1(2465,1865) ; LT4.7 v1(2920,1565) ; C24.2@2842.76,1865 v1(2940,1865) ; LT5.7 v1(3370,1570) ; C27.2@3282.76,1900 v1(3385,1900) ; C30.2@3737.24,1855 v1(3835,1855) ; LT6.7 3782.56,1470 v1@3802.56,1490 ; LT7.7 v1(4275,1495) ; C33.2@4197.76,1825 v1(4305,1825) ; LT8.7 v1(4740,1495) ; C36.2@4657.76,1835 v1(4750,1835) ; C59.2@5112.24,2660 v1(5215,2660) ; LT16.7@5117.5,2327.5 v1@5202.5,2327.5 ; LT9.7 v1(5220,1495) ; C39.2@5122.76,1835 v1(5235,1835) ; LT15.7 v1(5700,2330) ; C45.2@5617.24,1835 v1(5720,1835) ; C53.2@5617.24,2675 v1(5710,2675) ; LT10.7 v1(5710,1500) ; LT11.7 v1(6235,1500) ; C51.2@6142.76,1830 v1(6250,1830) ; LT14.7 v1(6230,2345) ; C47.2@6147.24,2730 v1(6245,2730) ; v1(6565,1820) C57.2@6657.76,1820 ; v1(6580,2705) C41.2@6652.76,2705 ; LT12.7 6715,1500 6725,1510 6725,1767.24 C57.2 ; LT13.7 6667.87,2352.87 6697.87,2352.87 6730,2385 6730,2684.14 6720.52,2693.62 C41.2@6678.62,2693.62
  Bottom Layer w10: v1(1160,2395) v1@1165,2390 ; v1(1475,1585) v1@1480.78,1590.78 ; v1(1505,1835) v1@1507.5,1837.5 ; v1@1955,1586.57 v1(1955,1580) v1@1960.78,1585.78 ; v1@1977.5,1837.5 v1(1980,1840) ; DIODE3.K@2234.02,2632.99 DIODE3.K ; C12.1@2438.5,2632.99 2465,2606.5 C12.1 ; v1@2454.18,1865 v1(2465,1865) v1@2465,1854.18 ; v1(2920,1565) v1@2920,1575.82 ; v1(3370,1570) 3370,1580.82 3385,1595.82 ; v1(4305,1825) v1@4310,1830 ; v1(4740,1495) v1@4745,1500 ; v1@4745,1830 v1(4750,1835) ; v1(5205,2330) v1@5210,2335 ; v1@5210,2655 v1(5215,2660) ; v1(5220,1495) 5220,1505.82 5235,1520.82 ; v1(5700,2330) v1@5705,2335 ; v1@5705,2670 v1(5710,2675) ; v1(5710,1500) v1@5715,1505 ; v1@5715,1830 v1(5720,1835) v1@5722.5,1832.5 ; v1(6230,2345) v1@6230,2355.82 ; v1(6235,1500) v1@6235,1510.82 ; v1@6247.5,1832.5 v1(6250,1830) v1@6255,1825 ; v1@6560,1825 v1(6565,1820) ; v1@6573.43,2705 v1(6580,2705)
  Bottom Layer w30: v1@1480.78,1590.78 1480.78,1615.78 1505,1640 v1(1505,1835) 1505,2050 1165,2390 2915,2390 2987.24,2462.24 C13.2 2917.24,2605 2730,2605 2685.67,2649.33 2685.67,2669.33 C11.1 ; v1@1507.5,1837.5 v1@1977.5,1837.5 ; v1@1955,1586.57 1980,1611.57 1980,1630 v1(1980,1840) 1982.57,1840 2007.57,1865 v1@2455.76,1865 ; *1.1 2177.01,2690 DIODE3.K@2234.02,2632.99 ; DIODE3.K C12.1@2438.5,2632.99 ; v1(2435,1605) 2435,1824.18 v1@2465,1854.18 ; v1(2465,1865) v1(2940,1865) ; C12.1 2613.31,2605.35 C11.1@2680,2672.05 ; v1@2920,1575.82 2940,1595.82 v1(2940,1865) ; 3385,1595.82 v1(3385,1900) ; v1(3810,1490) 3813.83,1493.83 3813.83,1553.83 3835,1575 v1(3835,1855) ; v1(4275,1495) 4305,1525 v1(4305,1825) ; v1@4310,1830 4745,1830 v1@4745,1500 ; v1(4750,1835) v1(5235,1835) ; v1@5210,2335 v1@5210,2655 ; 5235,1520.82 v1(5235,1835) ; v1@5705,2335 v1@5705,2670 ; v1@5715,1505 v1@5715,1830 ; v1(5720,1835) v1(5235,1835) ; v1@5722.5,1832.5 v1@6247.5,1832.5 ; v1@6230,2355.82 6245,2370.82 v1(6245,2730) ; v1@6235,1510.82 6250,1525.82 v1(6250,1830) ; v1@6255,1825 v1@6560,1825 ; v1@6573.43,2705 6548.43,2730 v1(6245,2730) ; v1(2940,1865) 3350,1865 v1(3385,1900) ; v1(3385,1900) 3790,1900 v1(3835,1855) ; v1(3835,1855) 4275,1855 v1(4305,1825) ; v1(4305,1825) 4305,2175 4790,2660 v1(5215,2660) 5458.83,2660 5473.83,2675 v1(5710,2675) 5765,2730 v1(6245,2730)
Cell_Input_1: LT1.3 LT2.2 | length 674.6
  Top Layer w10: v1(1085.95,1535) v1@1090.95,1530 ; LT2.2@1654.51,1579.51 LT2.2@1655,1580
  Top Layer w20: v1@1090.95,1530 1130,1530 1135.22,1524.78 LT1.3@1173.25,1524.78 ; v1(1575,1590) 1580.74,1584.26 1596.97,1584.26 1601.72,1579.51 LT2.2@1637.07,1579.51
  Bottom Layer w30: v1(1085.95,1535) 1165.95,1535 1170.95,1530 1515,1530 v1(1575,1590)
Cell_Input_2: LT2.3 LT3.2 | length 673.6
  Top Layer w10: v1(1585,1525) v1@1587.5,1527.5 ; LT2.3@1644.94,1530 1655,1530 LT2.3@1652.5,1527.5 ; v1(2065,1615) v1@2070.22,1609.78 ; LT3.2@2130.22,1609.78 LT3.2
  Top Layer w20: v1@1587.5,1527.5 LT2.3@1652.5,1527.5 ; v1@2070.22,1609.78 LT3.2@2130.22,1609.78
  Bottom Layer w30: v1(1585,1525) 1975,1525 v1(2065,1615)
Cell_Input_3: LT3.3 LT4.2 | length 641.6
  Top Layer w10: v1(2070,1545) v1@2075.22,1550.22 ; LT3.3@2130.22,1550.22 LT3.3 ; v1(2555,1570) v1@2557.5,1567.5 ; LT4.2@2627.5,1567.5 LT4.2
  Top Layer w20: v1@2075.22,1550.22 LT3.3@2130.22,1550.22 ; v1@2557.5,1567.5 LT4.2@2627.5,1567.5
  Bottom Layer w10: 2529.18,1555 2544.18,1570 v1(2555,1570)
  Bottom Layer w30: v1(2070,1545) 2519.18,1545 2529.18,1555
Cell_Input_4: LT4.3 LT5.2 | length 617
  Top Layer w10: v1(2560,1510) v1@2562.5,1512.5 ; LT4.3@2619.94,1515 LT4.3 LT4.3@2627.5,1512.5
  Top Layer w20: v1@2562.5,1512.5 LT4.3@2627.5,1512.5 ; v1(3000,1570) LT5.2
  Bottom Layer w30: v1(2560,1510) 2940,1510 v1(3000,1570)
Cell_Input_5: LT5.3 LT6.2 | length 624.1
  Top Layer w10: v1(3000.36,1499.64) v1@3011.18,1499.64 ; LT5.3@3059.5,1515.91 3060.19,1515.22 LT5.3@3064.97,1520 ; v1(3455,1475) v1@3457.5,1472.5 ; LT6.2@3527.5,1472.5 LT6.2
  Top Layer w20: v1@3011.18,1499.64 3027.44,1515.91 LT5.3@3059.5,1515.91 ; v1@3457.5,1472.5 LT6.2@3527.5,1472.5
  Bottom Layer w30: v1(3000.36,1499.64) 3210.41,1499.64 3220.77,1510 3420,1510 v1(3455,1475)
Cell_Input_6: LT6.3 LT7.2 | length 645.2
  Top Layer w10: v1(3450,1415) v1@3452.5,1417.5 ; LT6.3@3522.47,1417.5 LT6.3@3524.97,1420
  Top Layer w20: v1@3452.5,1417.5 LT6.3@3522.47,1417.5 ; v1(3905,1495) LT7.2
  Bottom Layer w30: v1(3450,1415) 3825,1415 v1(3905,1495)
Cell_Input_7: LT7.3 LT8.2 | length 705.5
  Top Layer w10: LT7.3@3970.16,1440.22 3974.94,1440.22 3980.22,1440.22 LT7.3 3980.22,1445 LT7.3@3974.94,1445 ; v1(4370,1500) v1@4372.5,1497.5 ; LT8.2@4442.5,1497.5 LT8.2
  Top Layer w20: v1(3895,1410) 3900.74,1415.74 3941.62,1415.74 3968.01,1442.13 3968.24,1442.13 LT7.3@3970.16,1440.22 ; v1@4372.5,1497.5 LT8.2@4442.5,1497.5
  Bottom Layer w30: v1(3895,1410) 4280,1410 v1(4370,1500)
Cell_Input_8: LT8.3 LT9.2 | length 669.7
  Top Layer w10: v1(4365,1415) v1@4373.64,1415 ; LT8.3@4437.47,1442.5 LT8.3@4439.97,1445 ; v1(4840,1500) v1@4842.5,1497.5 ; LT9.2@4907.5,1497.5 LT9.2
  Top Layer w20: v1@4373.64,1415 4401.14,1442.5 LT8.3@4437.47,1442.5 ; v1@4842.5,1497.5 LT9.2@4907.5,1497.5
  Bottom Layer w10: v1@4838.43,1500 v1(4840,1500)
  Bottom Layer w30: v1(4365,1415) 4734.29,1415 4794.29,1475 4809.59,1475 4834.59,1500 v1@4838.43,1500
Cell_Input_9: LT9.3 LT10.2 | length 738.7
  Top Layer w10: LT9.3@4896.17,1442.5 LT9.3@4899.94,1442.5 ; LT9.3@4899.94,1445 LT9.3
  Top Layer w20: v1(4815,1425) 4823.12,1425 4843.12,1445 4893.67,1445 LT9.3@4896.17,1442.5 ; v1(5340,1500) LT10.2
  Bottom Layer w30: v1(4815,1425) 5032.71,1425 5042.71,1415 5255,1415 5280,1440 v1(5340,1500)
Cell_Input_10: LT10.3 LT11.2 | length 737.9
  Top Layer w10: v1(5335,1410) v1@5335,1416.79 ; LT10.3@5399.94,1445.22 5405.22,1445.22 LT10.3 5405.22,1450 LT10.3@5399.94,1450
  Top Layer w20: v1@5335,1416.79 5363.42,1445.22 LT10.3@5399.94,1445.22 ; v1(5860,1500) LT11.2
  Bottom Layer w30: v1(5335,1410) 5770,1410 v1(5860,1500)
Cell_Input_11: LT11.3 LT12.2 | length 696.4
  Top Layer w10: v1(5865,1425) v1@5872.65,1432.65 ; LT11.3@5908.39,1445.22 5925.22,1445.22 LT11.3
  Top Layer w20: v1@5872.65,1432.65 5895.83,1432.65 LT11.3@5908.39,1445.22 ; v1(6385,1500) LT12.2
  Bottom Layer w30: v1(5865,1425) 6310,1425 v1(6385,1500)
Cell_Input_12: LT12.3 LT13.2 | length 1683.4
  Top Layer w10: v1(6390.78,2360.78) v1@6396.78,2354.78 ; v1(6395.36,1439.64) v1@6400.93,1445.22 ; LT13.2@6434.2,2354.78 6438.98,2350 LT13.2 ; LT12.3@6450.22,1445.22 LT12.3
  Top Layer w20: v1@6396.78,2354.78 LT13.2@6434.2,2354.78 ; v1@6400.93,1445.22 LT12.3@6450.22,1445.22
  Bottom Layer w10: v1(6395.36,1439.64) v1@6395.71,1440
  Bottom Layer w30: v1(6390.78,2360.78) 6594.22,2360.78 6780,2175 6780,1500 6720,1440 v1@6395.71,1440
Cell_Input_13: LT13.3 LT14.2 | length 667.8
  Top Layer w10: v1(5870,2350) v1@5872.5,2347.5 ; LT14.2@5932.5,2347.5 LT14.2
  Top Layer w20: v1@5872.5,2347.5 LT14.2@5932.5,2347.5 ; v1@6395,2300 LT13.3
  Bottom Layer w30: v1(5870,2350) 5920,2300 v1(6390,2300)
Cell_Input_14: LT14.3 LT15.2 | length 691.1
  Top Layer w10: v1(5340,2340) v1@5345.22,2334.78 ; LT15.2@5400.22,2334.78 LT15.2 ; v1(5840,2285) v1@5845.22,2290.22 ; LT14.3@5930.22,2290.22 LT14.3
  Top Layer w20: v1@5345.22,2334.78 LT15.2@5400.22,2334.78 ; v1@5845.22,2290.22 LT14.3@5930.22,2290.22
  Bottom Layer w30: v1(5340,2340) 5395,2285 v1(5840,2285)
Cell_Input_15: LT15.3 LT16.2 | length 686
  Top Layer w10: v1@4837.5,2327.5 v1(4835,2330) v1@4845.82,2330 ; LT16.2@4902.5,2327.5 LT16.2 ; v1(5330,2265) v1@5340.82,2265
  Top Layer w20: v1@4837.5,2327.5 LT16.2@4902.5,2327.5 ; v1@5340.82,2265 5355.82,2280 LT15.3
  Bottom Layer w30: v1(4835,2330) 4900,2265 v1(5330,2265)
Cell_Input_16: LT16.3 | length 79.6
  Top Layer w10: v1(4829.64,2264.64) v1@4835.22,2270.22 ; LT16.3@4900.22,2270.22 LT16.3
  Top Layer w20: v1@4835.22,2270.22 LT16.3@4900.22,2270.22
Fuel_Cell_Voltage_1: C16.2 R1.2 | length 331.2
  Top Layer w10: v1@1282.76,1317.76 v1(1285,1320) ; R1.2@1389.09,1257.76 R1.2
  Top Layer w20: v1@1282.76,1317.76 1245,1317.76 C16.2 R1.2@1389.09,1257.76
Fuel_Cell_Voltage_2: C19.2 R2.2 | length 338.3
  Top Layer w10: C19.2 C19.2@1659.09,1248.66
  Top Layer w20: C19.2 1707.24,1305 v1(1760,1305) ; C19.2@1659.09,1248.66 R2.2
Fuel_Cell_Voltage_3: C22.2 R3.2 | length 345.4
  Top Layer w10: C22.2 C22.2@2139.09,1293.66
  Top Layer w20: C22.2 2192.24,1355 v1(2245,1355) ; C22.2@2139.09,1293.66 R3.2
Fuel_Cell_Voltage_4: C25.2 R4.2 | length 335.4
  Top Layer w10: C25.2 C25.2@2631.85,1233.66
  Top Layer w20: C25.2 2689.49,1295 v1(2730,1295) ; C25.2@2631.85,1233.66 R4.2
Fuel_Cell_Voltage_5: C28.2 R5.2 | length 346.9
  Top Layer w20: v1(3180,1320) 3135,1320 C28.2 R5.2
Fuel_Cell_Voltage_6: C31.2 R6.2 | length 335.4
  Top Layer w10: C31.2 C31.2@3534.09,1148.66
  Top Layer w20: C31.2 3587.24,1210 v1(3630,1210) ; C31.2@3534.09,1148.66 R6.2
Fuel_Cell_Voltage_7: C34.2 R7.2 | length 341.9
  Top Layer w10: C34.2 C34.2@3985.91,1178.66 ; v1@4087.76,1242.76 v1(4090,1245)
  Top Layer w20: v1@4087.76,1242.76 4050,1242.76 3985.91,1178.66 R7.2
Fuel_Cell_Voltage_8: C37.2 R8.2 | length 339.5
  Top Layer w10: v1@4537.76,1237.76 v1(4545,1245) ; R8.2@4650.91,1177.76 R8.2
  Top Layer w20: v1@4537.76,1237.76 4505,1237.76 C37.2 R8.2@4650.91,1177.76
Fuel_Cell_Voltage_9: C42.2 R9.2 | length 346.2
  Top Layer w10: R9.2@5119.09,1187.76 R9.2
  Top Layer w20: v1(5020,1250) 4972.24,1250 C42.2 R9.2@5119.09,1187.76
Fuel_Cell_Voltage_10: C48.2 R11.2 | length 341.9
  Top Layer w20: v1(5515,1265) 5475,1265 C48.2 R11.2
Fuel_Cell_Voltage_11: C54.2 R13.2 | length 336
  Top Layer w10: C54.2 C54.2@5935.43,1202.32
  Top Layer w20: C54.2 5987.24,1265 v1(6030,1265) ; C54.2@5935.43,1202.32 R13.2
Fuel_Cell_Voltage_12: C60.2 R15.2 | length 333.6
  Top Layer w10: C60.2 C60.2@6458.15,1218.66 ; v1@6550.51,1275.51 v1(6555,1280)
  Top Layer w20: v1@6550.51,1275.51 6515,1275.51 6458.15,1218.66 R15.2
Fuel_Cell_Voltage_13: C43.2 R10.2 | length 329.9
  Top Layer w10: C43.2 C43.2@6455.91,2018.66 ; v1@6552.76,2077.76 v1(6555,2080)
  Top Layer w20: v1@6552.76,2077.76 6515,2077.76 6455.91,2018.66 R10.2
Fuel_Cell_Voltage_14: C49.2 R12.2 | length 328.9
  Top Layer w10: C49.2 C49.2@5940.43,2037.32
  Top Layer w20: C49.2 5997.24,2095 v1(6040,2095) ; C49.2@5940.43,2037.32 R12.2
Fuel_Cell_Voltage_15: C55.2 R14.2 | length 331.2
  Top Layer w10: v1@5492.76,2097.76 v1(5500,2105) ; R14.2@5614.09,2042.76 R14.2
  Top Layer w20: v1@5492.76,2097.76 5460,2097.76 C55.2 R14.2@5614.09,2042.76
Fuel_Cell_Voltage_16: C61.2 R16.2 | length 329.1
  Top Layer w10: R16.2@5114.09,2052.76 R16.2
  Top Layer w20: v1(5010,2110) 4967.24,2110 C61.2 R16.2@5114.09,2052.76
GND: "Isolated DC/DC1.2" "Isolated DC/DC1.3" C1.1 C2.2 C3.2 C4.1 C5.1 C6.2 C7.2 C8.1 C9.2 C10.1 DC/DC1.3 DC/DC1.5 DC/DC1.6 DC/DC2.3 DC/DC2.5 DC/DC2.6 DIODE1.A DIODE2.A J1.2 | length 14787
  Bottom Layer w10: 1150,4579.14 1155.86,4585 ; DC/DC1.5@1290.28,4254.14 DC/DC1.5@1306.14,4270 ; C2.2@1306.14,3853.03 C2.2 C2.2@1322.61,3840 ; DIODE1.A@1819.65,4160.35 DIODE1.A DIODE1.A@1865,4115 ; DIODE1.A@1880,4100 DIODE1.A@1865,4115 ; DIODE1.A@1882.4,4086.09 1865,4103.49 DIODE1.A@1865,4115 ; 1910,3205 1914.11,3209.11 1953.26,3209.11 1955,3210.86 ; 1910,3255 1914.11,3250.89 1952.37,3250.89 1953.26,3250 ; C3.2@2775,4091.73 C3.2 ; C6.2 C6.2@3582.61,3810 ; DC/DC2.5@3591.14,4263.54 DC/DC2.5 ; C5.1 C5.1@3725,4167.24 ; J1.2@5865.71,4655 J1.2
  Bottom Layer w30: 1150,4579.14 1150,4300 1195.86,4254.14 DC/DC1.5@1290.28,4254.14 ; 1155.86,4585 1315,4585 DC/DC1.6 1450,4720 3710.08,4720 DC/DC2.6 DC/DC2.3 C5.1@3725,4167.24 ; C2.2 1293.11,3546.89 1350,3490 1785,3490 1880,3585 DIODE1.A@1880,4100 ; C2.2@1306.14,3853.03 DC/DC1.5@1306.14,4270 ; C2.2@1322.61,3840 1440,3957.39 DC/DC1.3 ; C1.1 DIODE1.A@1819.65,4160.35 ; DIODE1.A 1865,4130 1865,4112.57 1872.4,4105.17 1914.83,4105.17 2065,3955 2638.27,3955 C3.2@2775,4091.73 ; 1910,3205 2857.24,3205 C10.1 3030,3422.24 C9.2@3030,3597.05 ; 1953.26,3209.11 1953.26,3250 ; C9.2 3030,4247.76 C4.1 DC/DC2.5 ; C6.2@3582.61,3810 3707.76,3935.15 C5.1 ; DC/DC2.5@3591.14,4263.54 3553.11,4225.51 C6.2 3553.11,3526.89 3615,3465 3945,3465 4245,3765 4245,4055 ; DIODE2.A 4245,4055 ; C8.1 5472.76,4192.76 5645,4365 5645,4434.29 J1.2@5865.71,4655 ; C8.1@5388.7,4191.45 5312.24,4115 C7.2 5170,4025 5120,3975 4325,3975 4245,4055
"ISO GND": "Isolated DC/DC1.4" C11.2 C12.2 C13.1 C14.1 C15.1 C16.1 C17.1 C18.1 C19.1 C20.1 C21.1 C22.1 C23.1 C24.1 C25.1 C26.1 C27.1 C28.1 C29.1 C30.1 C31.1 C32.1 C33.1 C34.1 C35.1 C36.1 C37.1 C38.1 C39.1 C40.1 C41.1 C42.1 C43.1 C44.1 C45.1 C46.1 C47.1 C48.1 C49.1 C50.1 C51.1 C52.1 C53.1 C54.1 C55.1 C56.1 C57.1 C58.1 C59.1 C60.1 C61.1 C62.2 C63.2 C64.1 C65.2 DIODE3.A LT1.2 LT1.4 LT2.4 LT3.4 LT4.4 LT5.4 LT6.4 LT7.4 LT8.4 LT9.4 LT10.4 LT11.4 LT12.4 LT13.4 LT14.4 LT15.4 LT16.4 U1.4 | length 33961.9
  Top Layer w10: C62.2@1141.38,2181.38 1141.38,2184.33 1157.05,2200 C62.2 ; 1153.18,1580 1158.39,1574.78 1174.72,1574.78 1179.94,1580 1163.61,1580 LT1.2@1162.15,1578.54 ; C16.1@1180,1357.24 C16.1 ; C14.1 C14.1@1197.76,1735 ; C63.2@1282.76,2200 C63.2 C63.2@1307.76,2175 ; U1.4 U1.4@1517.01,2175 ; C19.1@1636.38,1328.62 C19.1 C19.1@1645.01,1357.24 ; C17.1@1647.76,1735 C17.1 ; LT2.4 LT2.4@1655,1480 ; 2070,1205.86 2075.86,1200 ; C64.1@2097.76,2210 C64.1 ; C21.1@2342.24,1760 C21.1 ; 2540,1170.86 2545.86,1165 ; C25.1@2611.38,1311.38 C25.1 ; C23.1@2632.24,1767.76 C23.1 ; C24.1@2837.24,1765 C24.1 ; C28.1@3067.75,1347.24 C28.1 ; C30.1@3730,1767.76 C30.1 ; C33.1@4190,1732.76 C33.1 ; C35.1@4445,1727.76 C35.1 ; C36.1@4645,1737.76 C36.1 ; C61.1@4905,2152.24 C61.1 ; C58.1 C58.1@4920,2567.76 ; C39.1@5115,1732.76 C39.1 ; C52.1@5395,2567.76 C52.1 ; C48.1@5409.49,1295 C48.1 ; C44.1@5410,1737.76 C44.1 ; C50.1@5925,1742.76 C50.1 ; C49.1@5935,2137.24 C49.1 ; C46.1 C46.1@5945,2637.76 ; C40.1@6450,2637.76 C40.1 C40.1@6470,2617.76 ; C60.1 C60.1@6460,1305 ; C56.1@6455,1732.76 C56.1 ; C43.1 C43.1@6457.76,2115 ; 6519.14,2855 6525,2849.14 ; C57.1@6660,1727.76 C57.1
  Top Layer w20: C62.2@1141.38,2181.38 1025,2065 1025,1708.63 1155.08,1578.54 LT1.2@1162.15,1578.54 ; 1153.18,1580 1052.66,1580 1040.95,1568.28 1040.95,1470 LT1.4 C16.1@1180,1357.24 ; C62.2@1157.05,2200 1060,2297.05 1060,2454.14 1246.6,2640.74 2675.74,2640.74 v1(2870,2835) 4689.98,2835 4709.98,2855 6519.14,2855 ; C62.2 C63.2@1282.76,2200 ; C16.1 1110,1277.24 1110,1180 1125,1165 1430,1165 1622.24,1357.24 C19.1@1645.01,1357.24 ; C14.1@1197.76,1735 C15.1 C17.1@1647.76,1735 ; C63.2@1307.76,2175 U1.4 ; U1.4@1517.01,2175 1567.01,2125 1854.14,2125 1902.73,2173.59 1902.73,2197.73 C65.2 C64.1@2097.76,2210 ; C19.1@1636.38,1328.62 1636.38,1316.38 1585,1265 1585,1180.86 1590.86,1175 1915,1175 1980,1240 1980,1350 2022.24,1392.24 C22.1 ; C19.1 LT2.4 ; C17.1 1839.66,1722.76 1841.04,1724.13 1851.38,1724.13 C18.1 2117.76,1737.76 2140,1760 C21.1@2342.24,1760 ; 2070,1205.86 2070,1327.24 C22.1 ; 2075.86,1200 2439.05,1200 2569.05,1330 C25.1 LT4.4 ; LT3.4 C22.1 ; C21.1 C23.1@2632.24,1767.76 ; 2540,1170.86 2540,1230 2611.38,1301.38 C25.1@2611.38,1311.38 ; 2545.86,1165 2855,1165 3037.24,1347.24 3067.75,1347.24 2995,1274.49 2995,1180.86 3000.86,1175 3340,1175 3412.24,1247.24 C31.1 ; C23.1 C24.1@2837.24,1765 ; C24.1 3035,1767.76 C26.1 C27.1 3500,1802.76 C29.1 C30.1@3730,1767.76 ; C28.1 LT5.4 ; LT6.4 C31.1 ; C30.1 3965,1762.76 C32.1 C33.1@4190,1732.76 ; LT7.4 C34.1 ; C33.1 C35.1@4445,1727.76 ; LT8.4 C37.1 ; C35.1 C36.1@4645,1737.76 ; C36.1 C38.1 C39.1@5115,1732.76 ; C61.1@4905,2152.24 LT16.4 ; LT9.4 C42.1 ; C61.1 4830,2067.24 4830,1970.86 4835.86,1965 5260,1965 5275,1980 5275,2105 5307.24,2137.24 C55.1 ; C58.1@4920,2567.76 C59.1 C52.1@5395,2567.76 ; C39.1 C44.1@5410,1737.76 ; LT15.4 C55.1 ; C48.1@5409.49,1295 5215.86,1295 5210,1289.14 5210,1125 5195,1110 4835.86,1110 4830,1115.86 4830,1202.24 C42.1 ; LT10.4 C48.1 5330,1214.49 5330,1125.86 5335.86,1120 5685,1120 5705,1140 5705,1275 5732.24,1302.24 C54.1 ; C52.1 C53.1 5890,2582.76 C46.1 ; C44.1 C45.1 C50.1@5925,1742.76 ; LT11.4 C54.1 ; C50.1 C51.1 C56.1@6455,1732.76 ; C49.1@5935,2137.24 LT14.4 ; C46.1@5945,2637.76 C47.1 C40.1@6450,2637.76 ; LT12.4 C60.1 ; LT13.4 C43.1 ; C43.1@6457.76,2115 6490,2115 v1(6545,2170) ; C56.1 C57.1@6660,1727.76 ; C40.1 6473.62,2641.38 6476.38,2641.38 6525,2690 6525,2849.14 ; C40.1@6470,2617.76 C41.1 ; v1(6665,1635) C57.1 ; C31.1 3450,1167.24 3450,1085.86 3455.86,1080 3849.14,1080 3855,1085.86 3855,1240 3887.24,1272.24 C34.1 ; C34.1 3915,1202.24 3915,1095.86 3920.86,1090 4260,1090 4340,1170 4340,1230.27 4381.98,1272.24 C37.1 ; C37.1 4380,1207.24 4380,1095.86 4385.86,1090 4720,1090 4730,1100 4730,1220 4792.24,1282.24 C42.1 ; C55.1 5345,2077.24 5345,1950.86 5350.86,1945 5745,1945 5790,1990 5790,2075 5847.24,2132.24 C49.1 5904.14,2096.38 5872.24,2096.38 5855,2079.14 5855,1985 5885,1955 6220,1955 6377.24,2112.24 C43.1 ; C54.1 5855,1227.24 5855,1135.86 5860.86,1130 6204.14,1130 6210,1135.86 6210,1255 6265,1310 C60.1 ; C60.1 6390,1245 6390,1110.86 6395.86,1105 6740,1105 6765,1130 6765,1905 6730,1940 6375.86,1940 6370,1945.86 6370,2027.24 C43.1
  Bottom Layer w10: C12.2@2447.36,2757.01 C12.2 ; v1@2870,2824.18 v1(2870,2835)
  Bottom Layer w30: 1910,2755 1934.03,2755 1949.03,2770 2221.02,2770 2234.02,2757.01 DIODE3.A C12.2@2447.36,2757.01 ; C12.2 2660,2774.65 2744.33,2690.32 2744.33,2680.67 C11.2 C13.1 2892.76,2801.42 v1@2870,2824.18 ; v1(6545,2170) 6665,2050 v1(6665,1635)
Microcontroller: C7.1 C8.2 DC/DC2.4 L2.2 | length 2720.6
  Top Layer w30: v1(3620,4160) 5355,4160 5490,4295 v1(5490,4300)
  Bottom Layer w10: C7.1@5164.29,4290 C7.1 ; C8.2@5387.05,4284.29 5390,4287.24 C8.2@5402.76,4300
  Bottom Layer w30: v1(3620,4160) 3658.07,4198.07 DC/DC2.4 ; L2.2 C7.1@5164.29,4290 ; C7.1 C8.2@5387.05,4284.29 ; C8.2@5402.76,4300 v1(5490,4300)
Net*1_2: "Isolated DC/DC1.5" *1.2 | length 132.6
  Bottom Layer w10: *1.2@2022.28,2705 2035,2692.28 *1.2
  Bottom Layer w30: 1910,2705 *1.2@2022.28,2705
NetDC/DC1_1: DC/DC1.1 DIODE1.K L1.1 | length 568.2
  Bottom Layer w10: DIODE1.K@1848.82,4289.92 DIODE1.K DIODE1.K@1853.74,4285
  Bottom Layer w30: DC/DC1.1 DIODE1.K@1848.82,4289.92 ; DIODE1.K@1853.74,4285 L1.1
NetDC/DC2_1: DC/DC2.1 DIODE2.K L2.1 | length 656.3
  Bottom Layer w10: DIODE2.K@4236.26,4285 DIODE2.K ; L2.1@4506.26,4293.74 L2.1
  Bottom Layer w30: DC/DC2.1 DIODE2.K@4236.26,4285 ; DIODE2.K L2.1@4506.26,4293.74
NetLT1_6: LT1.6 R1.1 | length 245.9
  Top Layer w10: R1.1 R1.1@1397.87,1341.34 ; LT1.6 LT1.6@1394.78,1515.22
  Top Layer w20: LT1.6@1394.78,1515.22 1396.7,1517.13 1413.54,1517.13 1415.45,1515.22 1428.28,1515.22 1440,1503.5 1440,1383.46 R1.1@1397.87,1341.34
NetLT2_6: LT2.6 R2.1 | length 240.5
  Top Layer w10: R2.1 R2.1@1872.87,1331.34
  Top Layer w20: R2.1@1872.87,1331.34 1915,1373.46 1915,1490.06 LT2.6@1875.06,1530
NetLT3_6: LT3.6 R3.1 | length 244.8
  Top Layer w10: R3.1 R3.1@2352.87,1376.34 ; LT3.6 LT3.6@2355.06,1555
  Top Layer w20: R3.1@2352.87,1376.34 2410,1433.46 2410,1500.06 2392.56,1517.5 2392.56,1520.53 2358.09,1555 LT3.6@2355.06,1555
NetLT4_6: LT4.6 R4.1 | length 250.3
  Top Layer w10: R4.1 R4.1@2847.87,1316.34 ; LT4.6 LT4.6@2850.06,1515
  Top Layer w20: R4.1@2847.87,1316.34 2887.56,1356.02 2887.56,1480.53 2853.09,1515 LT4.6@2850.06,1515
NetLT5_6: LT5.6 R5.1 | length 240.2
  Top Layer w10: R5.1 R5.1@3287.87,1337.68 ; LT5.6 LT5.6@3290.06,1520
  Top Layer w20: R5.1@3287.87,1337.68 3335,1384.8 3335,1478.09 3293.09,1520 LT5.6@3290.06,1520
NetLT6_6: LT6.6 R6.1 | length 242.4
  Top Layer w10: R6.1 R6.1@3747.87,1231.34 ; LT6.6 LT6.6@3750.06,1420
  Top Layer w20: R6.1@3747.87,1231.34 3790,1273.46 3790,1383.09 3753.09,1420 LT6.6@3750.06,1420
NetLT7_6: LT7.6 R7.1 | length 237.4
  Top Layer w10: R7.1 R7.1@4202.87,1261.34 ; LT7.6 LT7.6@4205.06,1445
  Top Layer w20: R7.1@4202.87,1261.34 4245,1303.46 4245,1408.09 4208.09,1445 LT7.6@4205.06,1445
NetLT8_6: LT8.6 R8.1 | length 246.5
  Top Layer w10: R8.1 R8.1@4662.87,1256.34 ; LT8.6 LT8.6@4665.06,1445
  Top Layer w20: R8.1@4662.87,1256.34 4710,1303.46 4710,1403.09 4668.09,1445 LT8.6@4665.06,1445
NetLT9_6: LT9.6 R9.1 | length 231.5
  Top Layer w10: R9.1 R9.1@5127.87,1271.34 ; LT9.6 LT9.6@5130.06,1445
  Top Layer w20: R9.1@5127.87,1271.34 5175,1318.46 5175,1403.09 5133.09,1445 LT9.6@5130.06,1445
NetLT10_6: LT10.6 R11.1 | length 225.2
  Top Layer w10: R11.1 R11.1@5627.87,1282.68 ; LT10.6 LT10.6@5630.06,1450
  Top Layer w20: R11.1@5627.87,1282.68 5675,1329.8 5675,1408.09 5633.09,1450 LT10.6@5630.06,1450
NetLT11_6: LT11.6 R13.1 | length 216.7
  Top Layer w10: R13.1 R13.1@6147.87,1285 ; LT11.6 LT11.6@6150.06,1450
  Top Layer w20: R13.1@6147.87,1285 6187.56,1324.69 6187.56,1415.53 6153.09,1450 LT11.6@6150.06,1450
NetLT12_6: LT12.6 R15.1 | length 206.5